# Altium PCB PCB1.PcbDoc
Units mil, origin at the board's own origin, x right, y up, seen from the top; angles counter-clockwise.
Board outline 2196.85 x 480.32 mil, 4 copper layers (Top Layer, Signal Layer 1, Signal Layer 2, Bottom Layer), stack 62.192 mil thick; 27 components, 19 nets, 87 pads, 24 vias.
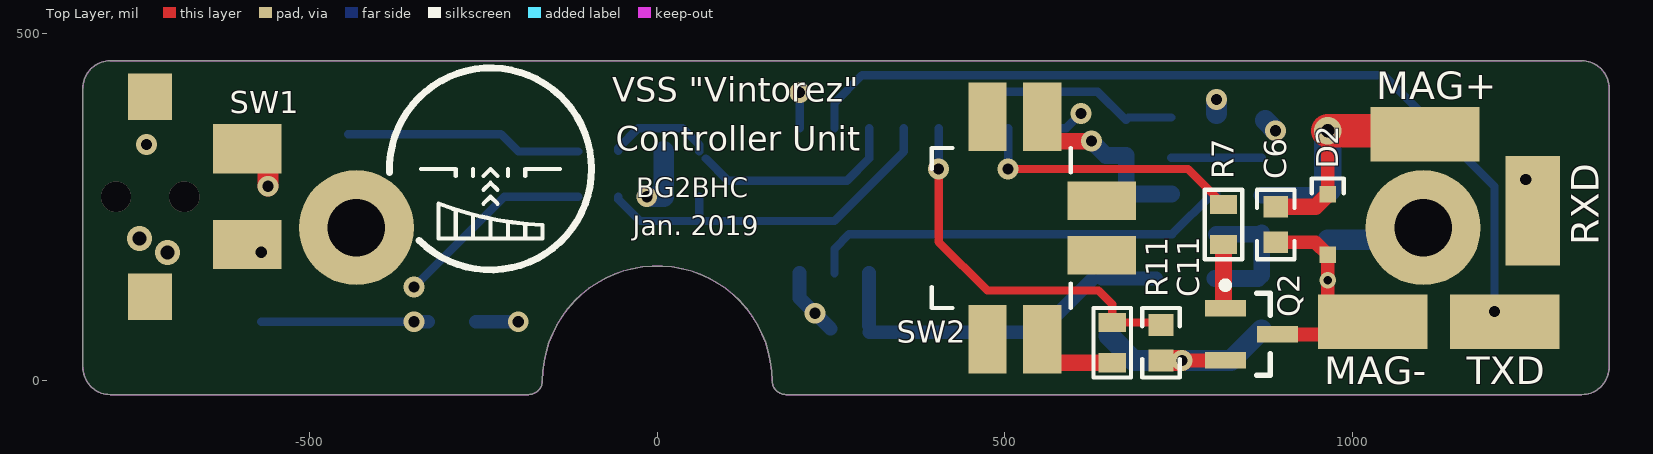
[diagram p0: Top Layer view]
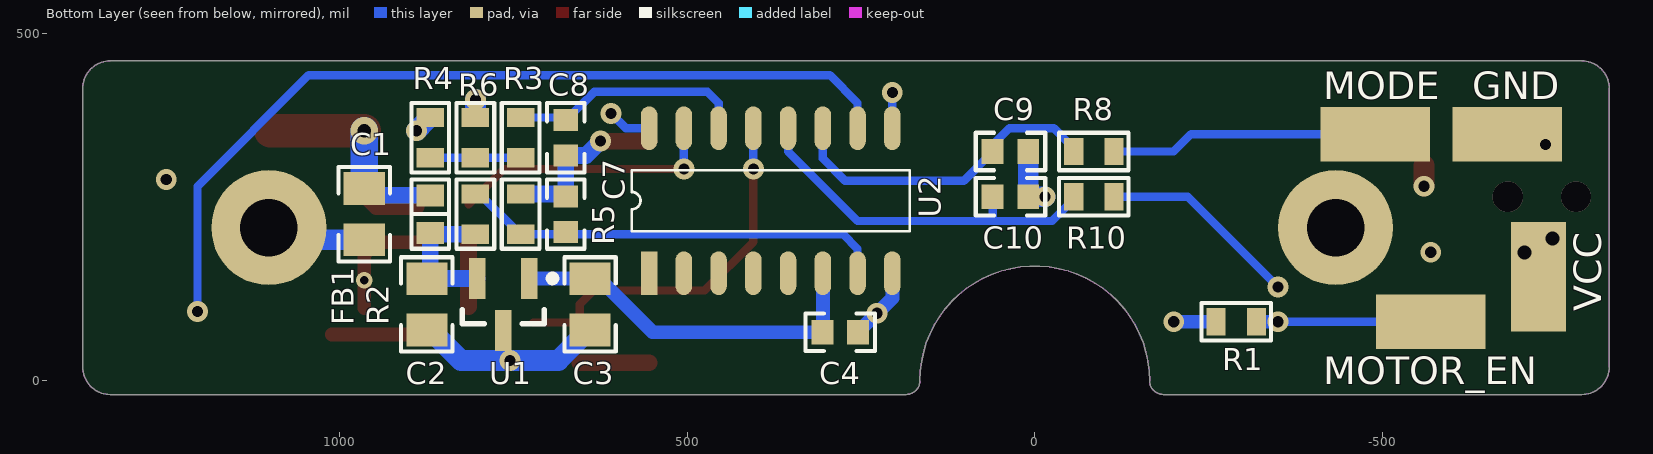
[diagram p1: Bottom Layer view, seen from below]
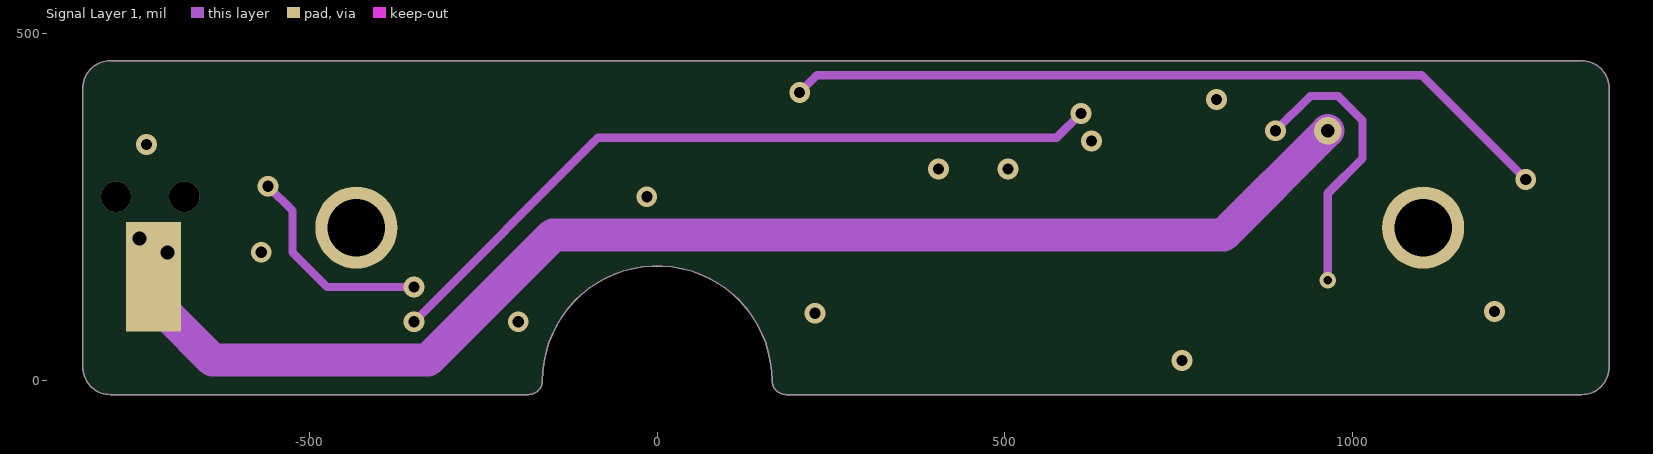
[diagram p2: Signal Layer 1]
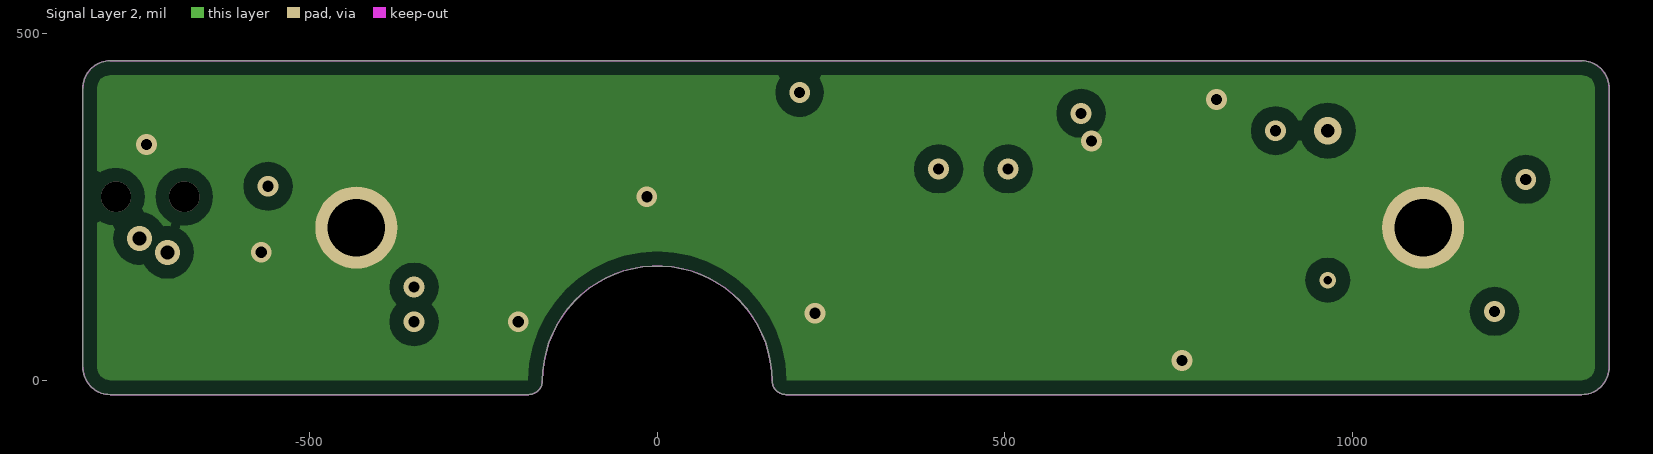
[diagram p3: Signal Layer 2]

## Layer stack, top to bottom
Top Solder: solder mask 0.4, Solder Resist, Dk 3.5
Top Layer: signal copper 1.4
Dielectric 1: core 7.874, FR-4, Dk 4.2
Signal Layer 1: signal copper 1.4173
Dielectric 3: prepreg 40.8094, Dk 4.2
Signal Layer 2: signal copper 1.4173
Dielectric 2: core 7.874, Dk 4.2
Bottom Layer: signal copper 1.4
Bottom Solder: solder mask 0.4, Solder Resist, Dk 3.5

## Board outline
-826.77,19.68 ccw(c-787.4,19.68) -787.4,-19.69 -787.4,-19.68 -185.04,-19.68 ccw(c-185.04,0) -165.35,0 cw(c0,0) 165.35,0 ccw(c185.04,0) 185.04,-19.68 1330.71,-19.68 1330.71,-19.69 ccw(c1330.71,19.68) 1370.08,19.68 1370.08,421.26 ccw(c1330.71,421.26) 1330.71,460.63 -787.4,460.63 ccw(c-787.4,421.26) -826.77,421.26

## Design rules (kind name [scope] priority, off if disabled: settings)
Clearance [All] p1: gap=10 except(20: Arc-Poly Track-Poly SMDPad-Poly THPad-Poly Via-Poly Fill-Poly Poly-Poly)
PolygonConnect [All] p1: connectstyle=Direct reliefconductorwidth=10 reliefentries=4 polygonreliefangle="90 Angle" airgapwidth=10
RoutingVias [All] p1: holewidth=28 width=50 viastyle="Through Hole" minholewidth=28 minwidth=50 maxholewidth=28 maxwidth=50
SolderMaskExpansion [All] p1: expansion=4
Width [All] p1: maxlimit=100 minlimit=10 preferedwidth=10
30 further rules are at their usual default settings.

## Components (designator, comment, footprint, x,y, rotation, side; value= is the part's Value field where it differs from the comment)
C1 "CT41L-0805-2C1-25V-225K" 0805[cap] 965,240 r270 bottom
C2 "CT41L-0805-2C1-25V-225K" 0805[cap] 875,110 r270 bottom
C3 "CT41L-0805-2C1-25V-225K" 0805[cap] 640,110 r270 bottom
C4 "CT41L-0603-2C1-50V-224K" 0603[cap] 280,70 r180 bottom
C6 "CT41L-0603-2C1-50V-224K" 0603[cap] 890,225 r270 top
C7 "CT41L-0603-2C1-50V-224K" 0603[cap] 675,240 r90 bottom
C8 "CT41L-0603-2C1-50V-224K" 0603[cap] 675,350 r270 bottom
C9 "CT41L-0603-2C1-50V-224K" 0603[cap] 35,330 r180 bottom
C10 "CT41L-0603-2C1-50V-224K" 0603[cap] 35,265 r180 bottom
C11 "CT41L-0603-2C1-50V-224K" 0603[cap] 725,55 r270 top
D2 "1N4148WS" SOD323 965,225 r90 top
FB1 "MLCB2B1608-102B" 0603[bead] 870,240 r270 bottom
Q2 "MMBT3904" SOT23-3N 855,66.81 r0 top
R1 "RMK1608MB102J" 0603[res] -290,85 r180 bottom
R2 "RMK1608MB102J" 0603[res] 805,240 r270 bottom
R3 "RMK1608MB102J" 0603[res] 740,350 r270 bottom
R4 "RMK1608MB102J" 0603[res] 870,350 r270 bottom
R5 "RMK1608MB102J" 0603[res] 740,240 r270 bottom
R6 "RMK1608MB102J" 0603[res] 805,350 r270 bottom
R7 "RMK1608MB102J" 0603[res] 815,225 r270 top
R8 "RMK1608MB102J" 0603[res] -85,330 r0 bottom
R10 "RMK1608MB102J" 0603[res] -85,265 r0 bottom
R11 "RMK1608MB102J" 0603[res] 655,55 r90 top
SW1 "SW-SPST" JJJHRGG200NOPMRTR -730,265 r90 top
SW2 "按钮开关-90度-贴片" 按钮开关-90度-贴片 495,220 r90 top
U1 "78L05" SOT23-3N 765,110 r270 bottom
U2 "STC15W201S_SOP16_DIP16" SOP16 555,155 r90 bottom

## Footprints (in the part's own frame and the unit in brackets; to place one, negate y for a bottom-side part, rotate by r counter-clockwise, add the part's x,y. Pads: shape width x height; smd on the part's side, far side on the other; paste and mask are expansions set on the pad)
0603[bead] [mm] "Body 1.6x0.8mm"
  rect 0.8x1 smd: 1(-0.685,0) 2(0.685,0)
  silkscreen extent -1.27,-0.69 1.27,0.69, body extent -0.76,-0.38 0.76,0.38, height 0.75
0603[cap] [mm] "Body 1.6x0.8mm"
  rect 0.8x0.9 smd: 1(-0.65,0) 2(0.65,0)
  silkscreen extent -1.27,-0.69 1.27,0.69, body extent -0.76,-0.38 0.76,0.38, height 0.75
0603[res] [mm] "Body 1.6x0.8mm"
  rect 0.7x1 smd: 1(-0.735,0) 2(0.735,0)
  silkscreen extent -1.27,-0.69 1.27,0.69, body extent -0.76,-0.38 0.76,0.38, height 0.75
0805[cap] [mm] "2.0 x 1.3 mm"
  rect 1.2x1.5 smd: 1(-0.939,0) 2(0.939,0)
  silkscreen extent -1.73,-0.94 1.73,0.94, body extent -1.02,-0.64 1.02,0.64, height 0.89
JJJHRGG200NOPMRTR [mm]
  rect 1.7x1.6 smd: 0(-3.65,0) 0(3.65,0)
  rect 1.8x2.5 smd: 1(-1.75,-3.55) 2(1.75,-3.55)
  body extent -3.05,-2.45 3,4.44, height 2
SOD323 [mm]
  rect 0.6x0.6 smd: 1(-1.1,0) 2(1.1,0)
  silkscreen extent 1.14,-0.58 1.68,0.58, body extent -0.89,-0.64 0.89,0.64, height 1.1
SOP16 [mm]
  rect 1.6x0.6 smd: 1(0,0)
  oval 1.6x0.6 smd: 2(0,-1.27) 3(0,-2.54) 4(0,-3.81) 5(0,-5.08) 6(0,-6.35) 7(0,-7.62) 8(0,-8.89) 9(5.3,-8.89) 10(5.3,-7.62) 11(5.3,-6.35) 12(5.3,-5.08) 13(5.3,-3.81) 14(5.3,-2.54) 15(5.3,-1.27) 16(5.3,0)
  silkscreen extent 1.53,-9.53 3.77,0.63
SOT23-3N [mm] "SOT23, 3-Leads, Body 2.9x1.3mm, Pitch 0.95mm, Lead Span 2.5mm, IPC Medium Density"
  rect 1.5x0.6 smd: 1(-0.95,0.95) 2(-0.95,-0.95) 3(0.95,0)
  silkscreen extent -1.07,-1.5 0.7,1.92, body extent -0.7,-1.5 0.7,1.5, height 1.1
按钮开关-90度-贴片 [mm]
  rect 2.5x1.4 smd: 1(-4.064,0.5) 2(-4.064,-1.5) 4(4.064,0.5) 5(4.064,-1.5)
  rect 1.4x2.5 smd: 3(-1,-3.683) 6(1,-3.683)
  silkscreen extent -2.92,-2.54 2.92,2.54, body extent -2.92,-2.54 2.92,7.49, height 5.8

## Part data
C1 C2 C3 C4 C6 C7 C8 C9 C10 C11: library part Capacitor, "Chip Capacitor"
D2: library part Diode, "Default Diode"
FB1: library part bead, "Chip Bead"
Q2: "NPN General Purpose Amplifier"
R1 R2 R3 R4 R5 R6 R7 R8 R10 R11: library part Resistor, "Resistor"
SW1: "Single-Pole, Single-Throw Switch"

## Free pads (board coordinates)
  round 165.35 / inner round 118.11 / far side round 165.35 hole 82.68: 2(-433.07,220.47) 2(1102.36,220.47)
  rect 157.48x78.74 smd far side: 3(-680,355) 4(-570,85) 4(-490,355)
  rect 78.74x157.48 smd: 3(1260,245)
  rect 78.74x157.48 smd far side: 4(-725,150)
  rect 78.74x157.48 on Mid1: 4(-725,150)
  rect 157.48x78.74 smd: 4(1030,85) 4(1105,355) 4(1220,85)

## Via types
v1: diameter 30, hole 16, Top Layer to Bottom Layer, tented both sides, 18 vias
v2: diameter 43.31, hole 43.31, Top Layer to Bottom Layer, tented both sides, 2 vias
v3: diameter 36, hole 20, Top Layer to Bottom Layer, tented both sides, 2 vias
v4: diameter 40, hole 20, Top Layer to Bottom Layer, tented both sides, 1 vias
v5: diameter 24, hole 12, Top Layer to Bottom Layer, tented both sides, 1 vias

## Nets (pads, with @x,y where several pads share a name; then routed paths per layer and width w, separated by ;. In a path a pad name is that pad's centre, name@x,y a point inside that pad or via, vN(x,y) a via of type N, cw(c..) or ccw(c..) an arc to the next point about the centre after c; other vN are vias at no path point)
+5: C3.1 C4.1 U1.1 U2.6 | length 503.7
  Bottom Layer w20: C4.1@305,79.41 U2.6 ; C4.1 550,70 C3.1@625,145 ; C3.1@640,147.4 U1.1@717.6,147.4
COUNTER: C10.1 R10.2 U2.12 | length 537.4
  Bottom Layer w12: R10.2 -56.06,261.06 -25,230 255,230 355,330 U2.12 ; 60.59,230.59 C10.1
GND: C1.2 C2.2 C3.2 C4.2 C7.2 C8.2 C9.2 C10.2 C11.2 pad.2 pad.3@-680,355 Q2.2 R1.1 R5.1 R6.1 SW1.1 SW2.5 U1.3 U2.8 | length 982.4
  Top Layer w20: v1(755,29.41) Q2.2
  Top Layer w24: SW2.5@555,345 v1(625,345)
  Top Layer w30: C11.2 v1(755,29.41)
  Bottom Layer w20: R1.1 v1(-200,85) ; U2.8 205,119.41 C4.2@249.41,75
  Bottom Layer w24: v1(625,345) 645.59,324.41 C8.2 C7.2 ; C7.2@678.35,268.94 R5.1
  Bottom Layer w30: v1(-15,265) C10.2 C9.2 ; C3.2@650,65 685.3,29.7 ; 685.59,29.41 v1(755,29.41) 825.98,29.41 C2.2@869.6,73.03 ; R6.1@805,385 v1(805,405) ; C1.2 pad.2@1084.92,203.03
  other v1: 227.2,97.2 -570,185 -735,340
MAG-: C6.2 D2.1 pad.4@1030,85 Q2.3 R4.1 | length 710.6
  Top Layer w20: C6.2 947.28,199.41 D2.1 pad.4@965,105 ; Q2.3 pad.4@1011.81,66.81
  Signal Layer 1 w12: v1(890,360) 940,410 980,410 1015,375 1015,320 965,270 v5(965,145)
  Bottom Layer w30: R4.1@875,375 v1(890,360)
MAG_DET: C8.1 R3.1 U2.14 | length 341.4
  Bottom Layer w12: U2.14 455,400 471,416 634,416 674.41,375.59 C8.1 ; C8.1@678.35,378.94 R3.1
MAG_EN: R7.1 U2.15 | length 389.8
  Top Layer w12: v1(505,305) 763.94,305 R7.1
  Bottom Layer w12: v1(505,305) U2.15
MODE: C9.1 R8.2 U2.11 | length 457.1
  Bottom Layer w12: R8.2@-56.06,331.06 -56.06,335 -27.35,363.72 36.28,363.72 60.59,339.41 C9.1 ; C9.1@70,320 102,288 273,288 305,320 U2.11
MODE_SW: pad.4@-490,355 R8.1 | length 341.4
  Bottom Layer w12: pad.4@-445,355 -225,355 -200,330 R8.1
MOTOR_EN: pad.4@-570,85 R1.2 U2.16 | length 1388.1
  Signal Layer 1 w12: v1(-350,85) -85,350 575,350 v1(610,385)
  Bottom Layer w12: pad.4@-570,85 v1(-350,85) ; U2.16 588.66,363.66 v1(610,385)
  Bottom Layer w20: v1(-350,85) R1.2@-330,85
NetC2_1: C2.1 FB1.2 R2.2 U1.2 | length 186.3
  Bottom Layer w24: U1.2 C2.1@864.57,147.4 ; R2.2 FB1.2@868.03,211.06 ; C2.1@870,151.97 FB1.2
NetC7_1: C7.1 R2.1 R5.2 U2.7 | length 616.6
  Bottom Layer w12: U2.7 255,190 276.06,211.06 R5.2 ; R5.2@741.06,211.06 798.94,268.94 R2.1
NetQ2_1: Q2.1 R7.2 | length 89.3
  Top Layer w24: Q2.1@815,106.81 R7.2
NetR3_2: R3.2 R4.2 R6.2 | length 130
  Bottom Layer w12: R3.2 R6.2 R4.2
NetR10_1: R10.1 SW1.2 | length 625.1
  Top Layer w30: v1(-560,280) SW1.2@-560,310
  Signal Layer 1 w12: v1(-560,280) -525,245 -525,185 -475,135 v1(-350,135)
  Bottom Layer w12: v1(-350,135) -220,265 R10.1
NetR11_1: R11.1 SW2.2 | length 100
  Top Layer w24: SW2.2@555,26.06 R11.1
RXD: pad.3@1260,245 U2.9 | length 1168.8
  Signal Layer 1 w12: v1(205,415) 230,440 1100,440 v1(1250,290)
  Bottom Layer w12: U2.9 v1(205,415)
TRIGGER: C11.1 R11.2 U2.13 | length 543.7
  Top Layer w12: v1(405,305) 405,200 475,130 635,130 655,110 R11.2 C11.1@721.65,83.94
  Bottom Layer w12: v1(405,305) U2.13
TXD: pad.4@1220,85 U2.10 | length 1249.2
  Bottom Layer w12: U2.10 255,400 295,440 1045,440 1205,280 v1(1205,100)
VCC: C1.1 C6.1 D2.2 FB1.1 pad.4@1105,355 pad.4@-725,150 | length 2295.7
  Top Layer w20: D2.2 v4(965,360)
  Top Layer w24: C6.1 947.28,250.59 D2.2
  Top Layer w48: v4(965,360) pad.4@1100,360
  Signal Layer 1 w48: pad.4@-705,95 -640,30 -330,30 -150,210 815,210 v4(965,360)
  Bottom Layer w24: FB1.1 C1.1@940,266.97
  Bottom Layer w40: C1.1 v4(965,360)
  other v3: -705,185 -745,205
pads on no net: SW1.0 SW2.1 SW2.3 SW2.4 SW2.6 U2.1 U2.2 U2.3 U2.4 U2.5
copper on no net:
  other v2: -779.21,265 -680.79,265

## Polygon pours and split planes (outlines as drawn)
GND on Signal Layer 2 "GND_L03_P000" (solid, remove dead copper, pour order 0): 1375,-25 -850,-25 -850,475 1375,475

## Keep-outs
Keep-Out Layer:
  the board outline again, w1

## Silkscreen, mask and mechanical layers (free items; w line width, h text height)
Top Overlay:
  lines w6: -340,305 -290,305 -290,295 ; -290,205 -290,245 ; -265,205 -265,238 ; -265,295 -265,305 ; -250,255 -240,265 -230,255 ; -250,275 -240,285 -230,275 ; -250,295 -240,305 -230,295 ; -240,205 -240,233 ; -215,205 -215,225 ; -215,295 -215,305 ; -190,205 -190,225 ; -190,295 -190,305 -140,305 ; -165.04,205.04 -165.04,224.1 cw(c-140,725) -315,255 -315,205 -165,205
  lines w10: -385.26,299.99 cw(c-240,305) -342.77,202.23
  text "MAG+" at 1035,405 h40
  text "VSS \"Vintorez\"" at -65,390 h60
  text "Controller Unit" at -60,320 h60
  text "BG2BHC" at -30,255 h48
  text "Jan. 2019" at -35,200 h48
  text "RXD" at 1355,195 h40 r90
  text "MAG-" at 960,-5 h40
  text "TXD" at 1165,-5 h40
Bottom Overlay:
  text "GND" at -630,405 h40
  text "MODE" at -415,405 h40
  text "VCC" at -815,100 h40 r270
  text "MOTOR_EN" at -415,-5 h40
Mechanical 1:
  lines w6: -775.59,31.5 -775.59,409.45 1318.9,409.45 1318.9,31.5 -775.59,31.5
  lines w10: -216.54,0 cw(c0,0) 216.54,0